# Altium PCB PCB PRP1.PcbDoc
Units mil, origin at the board's own origin, x right, y up, seen from the top; angles counter-clockwise.
Board outline 4830 x 3485 mil, 2 copper layers (Top Layer, Bottom Layer); 14 components, 20 nets, 71 pads, 0 vias.
Unrouted connection lines stored in the file: 1.
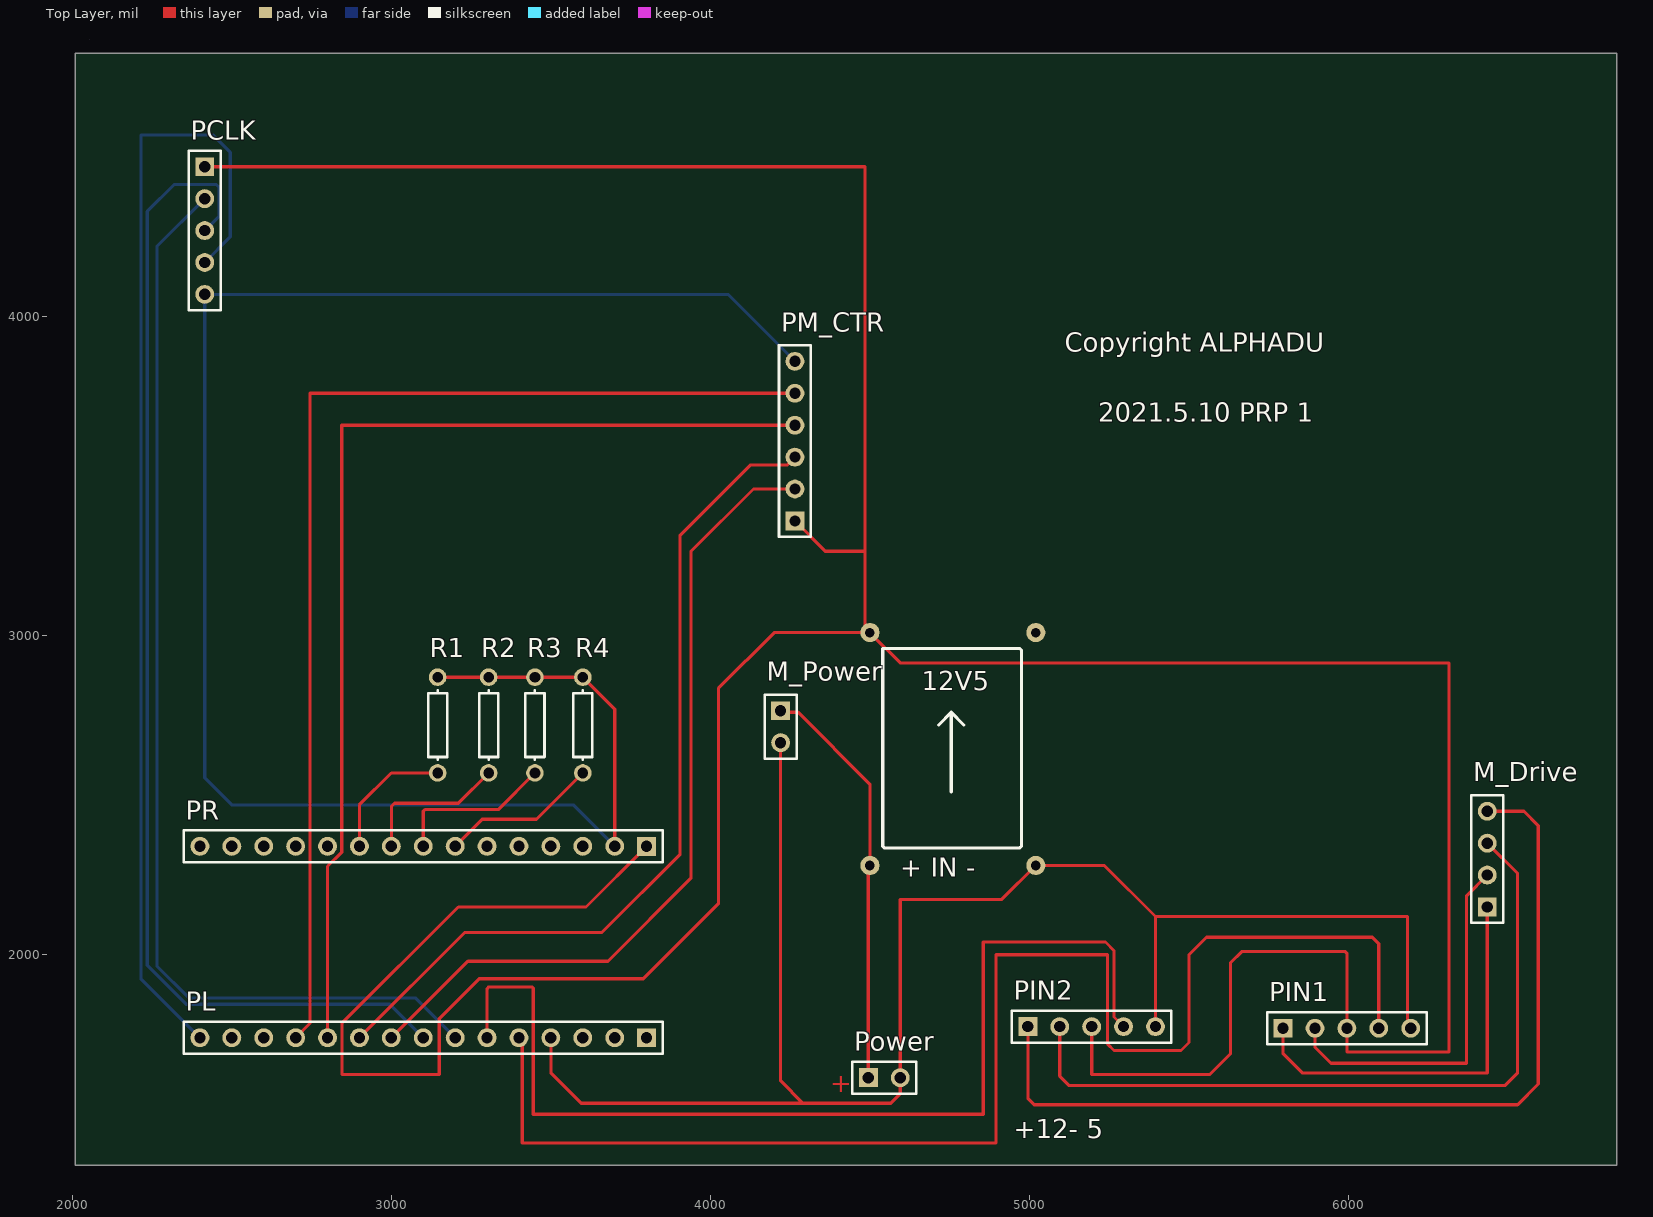
[diagram p0: Top Layer view]
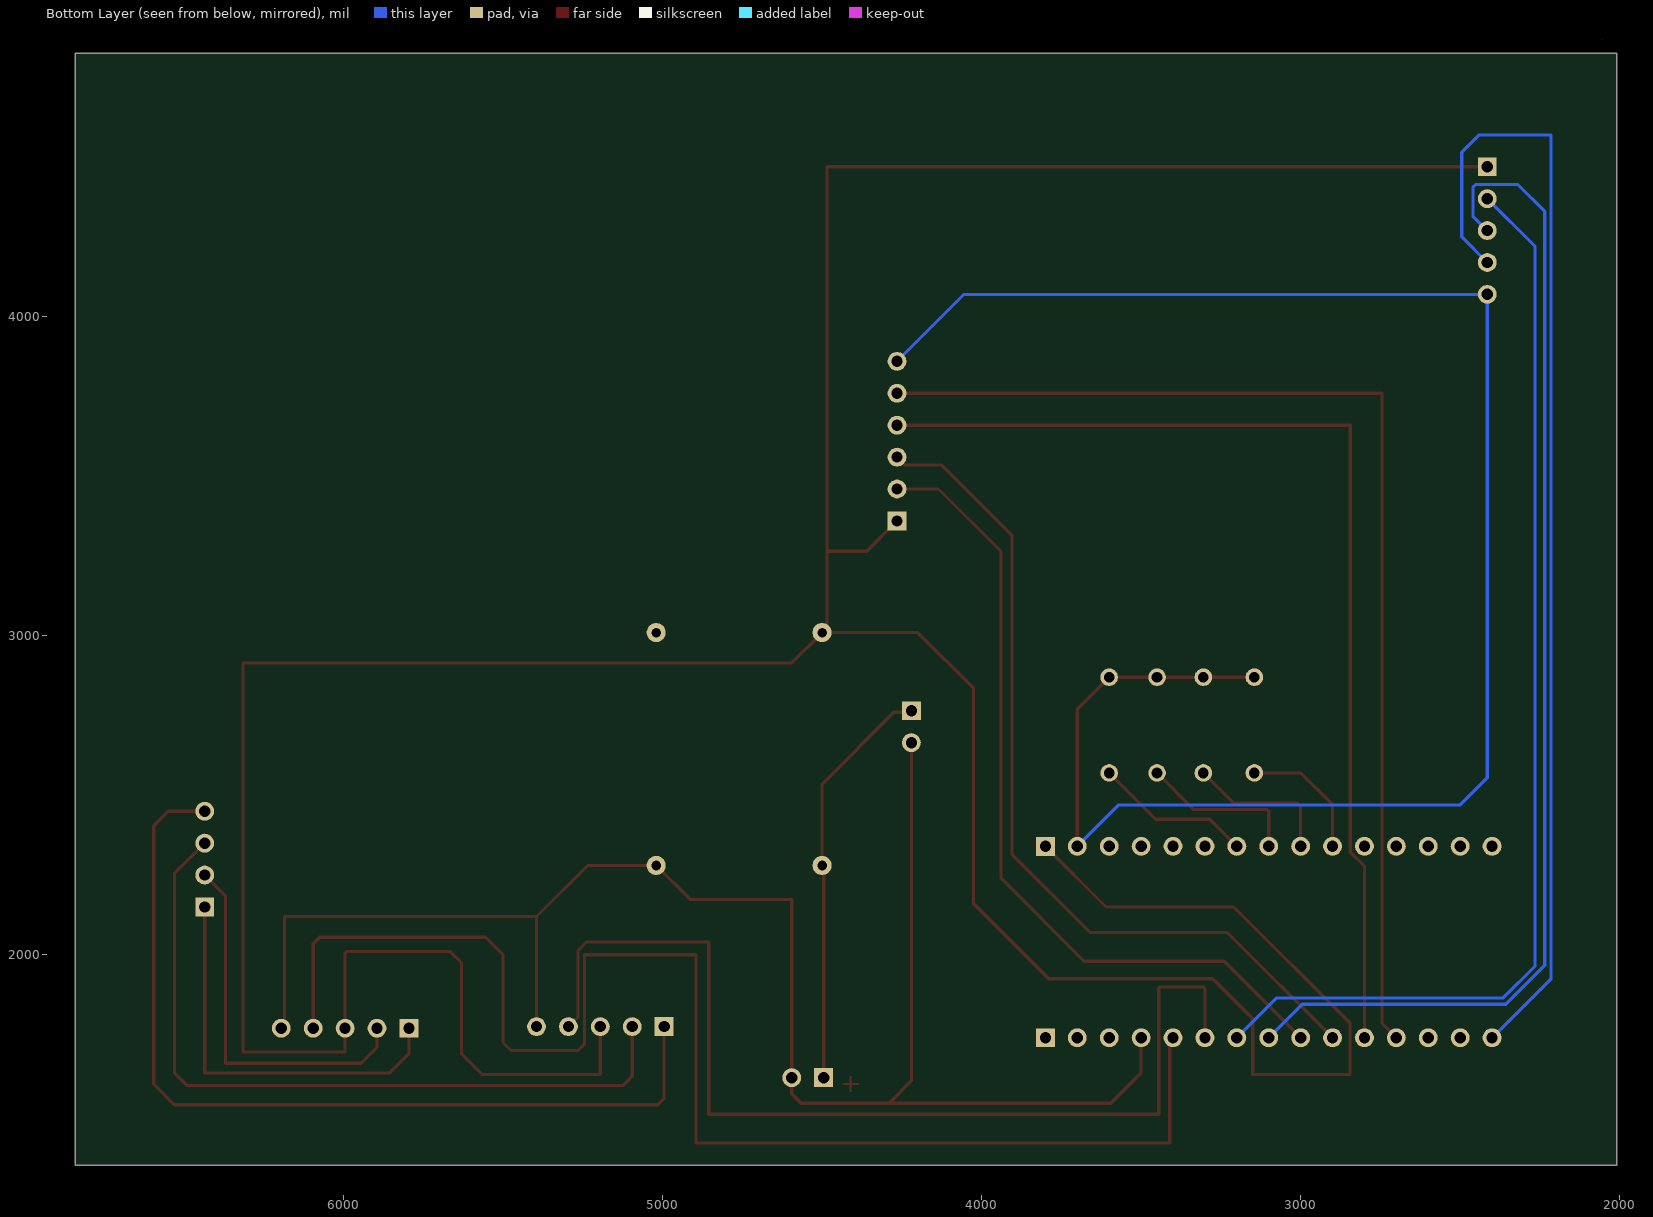
[diagram p1: Bottom Layer view, seen from below]

## Layer stack, top to bottom
Top Solder: solder mask 0.4, Solder Resist, Dk 3.5
Top Layer: signal copper 1.4
Dielectric 1: dielectric 12.6, FR-4, Dk 4.8
Bottom Layer: signal copper 1.4
Bottom Solder: solder mask 0.4, Solder Resist, Dk 3.5

## Board outline
2010,1340 2010,4825 6840,4825 6840,1340
cut-out: 2055,4870

## Design rules (kind name [scope] priority, off if disabled: settings)
Clearance [All] p1: gap=10 ignorepadtopadclearanceinfootprint=FALSE except(0: Arc-Hole Track-Hole SMDPad-Hole THPad-Hole Via-Hole Fill-Hole Poly-Hole Region-Hole Text-Hole)
PolygonConnect [All] p1: connectstyle=Relief reliefconductorwidth=10 reliefentries=4 polygonreliefangle="90 Angle" airgapwidth=10
RoomDefinition Sheet1 [InComponentClass('Sheet1')] p1: confinementstyle=ConfineIn formatcopy=TRUE lockcomponents=FALSE outline 2105,1375 6795,1375 6795,4825 2105,4825
RoutingVias [All] p1: holewidth=28 width=50 viastyle="Through Hole" minholewidth=28 minwidth=50 maxholewidth=28 maxwidth=50
SolderMaskExpansion [All] p1: expansion=4
Width [All] p1: maxlimit=10 minlimit=10 preferedwidth=10
30 further rules are at their usual default settings.

## Components (designator, comment, footprint, x,y, rotation, side; value= is the part's Value field where it differs from the comment)
12V5 "Header 2X2" POWER12V5 4760,2645 r0 top
M_Drive "Header 4" HDR1X4 6435,2150 r90 top
M_Power "Header 2" HDR1X2 4220,2765 r270 top
PCLK "Header 5" HDR1X5 2415,4470 r270 top
PIN1 "Header 5" HDR1X5 5795,1770 r0 top
PIN2 "Header 5" HDR1X5 4995,1775 r0 top
PL "Header 15" HDR1X15 3800,1740 r180 top
PM_CTR "Header 6" HDR1X6 4265,3360 r90 top
Power "Header 2" HDR1X2 4495,1615 r0 top
PR "Header 15" HDR1X15 3800,2340 r180 top
R1 "Res1" AXIAL-0.3 3145,2720 r270 top value=10K
R2 "Res1" AXIAL-0.3 3305,2720 r270 top value=10K
R3 "Res1" AXIAL-0.3 3450,2720 r270 top value=10K
R4 "Res1" AXIAL-0.3 3600,2720 r270 top value=10K

## Footprints (in the part's own frame and the unit in brackets; to place one, negate y for a bottom-side part, rotate by r counter-clockwise, add the part's x,y. Pads: shape width x height; smd on the part's side, far side on the other; paste and mask are expansions set on the pad)
AXIAL-0.3 [mm] "Axial Device, Thru-Hole; 2 Leads; 0.3 in Pin Spacing"
  round 1.4 hole 0.85: 1(-3.81,0) 2(3.81,0)
  silkscreen extent -2.77,-0.76 2.77,0.76
HDR1X2 [mm] "Connector; Header; 2 Position"
  rect 1.5x1.5 hole 0.9: 1(0,0)
  round 1.5 hole 0.9: 2(2.54,0)
  silkscreen extent -1.27,-1.27 3.81,1.27
HDR1X4 [mm] "Connector; Header; 4 Position"
  rect 1.5x1.5 hole 0.9: 1(0,0)
  round 1.5 hole 0.9: 2(2.54,0) 3(5.08,0) 4(7.62,0)
  silkscreen extent -1.27,-1.27 8.89,1.27
HDR1X5 [mm] "Connector; Header; 5 Position"
  rect 1.5x1.5 hole 0.9: 1(0,0)
  round 1.5 hole 0.9: 2(2.54,0) 3(5.08,0) 4(7.62,0) 5(10.16,0)
  silkscreen extent -1.27,-1.27 11.43,1.27
HDR1X6 [mm] "Connector; Header; 6 Position"
  rect 1.5x1.5 hole 0.9: 1(0,0)
  round 1.5 hole 0.9: 2(2.54,0) 3(5.08,0) 4(7.62,0) 5(10.16,0) 6(12.7,0)
  silkscreen extent -1.27,-1.27 13.97,1.27
HDR1X15 [mm] "Connector; Header; 15 Position"
  rect 1.5x1.5 hole 0.9: 1(0,0)
  round 1.5 hole 0.9: 2(2.54,0) 3(5.08,0) 4(7.62,0) 5(10.16,0) 6(12.7,0) 7(15.24,0) 8(17.78,0) 9(20.32,0) 10(22.86,0) 11(25.4,0) 12(27.94,0) 13(30.48,0) 14(33.02,0) 15(35.56,0)
  silkscreen extent -1.27,-1.27 36.83,1.27
POWER12V5 [mil]
  round 60 hole 30: 1(-260,365) 2(260,365) 3(-260,-365) 4(260,-365)
  silkscreen extent -220,-310 215,315

## Part data
12V5: "Header, 2-Pin, Dual row", LatestRevisionDate=17-Jul-2002, LatestRevisionNote="Re-released for DXP Platform.", Publisher="Altium Limited"
M_Drive: "Header, 4-Pin", LatestRevisionDate=17-Jul-2002, LatestRevisionNote="Re-released for DXP Platform.", Publisher="Altium Limited"
M_Power Power: "Header, 2-Pin", LatestRevisionDate=17-Jul-2002, LatestRevisionNote="Re-released for DXP Platform.", Publisher="Altium Limited"
PCLK PIN1 PIN2: "Header, 5-Pin", LatestRevisionDate=17-Jul-2002, LatestRevisionNote="Re-released for DXP Platform.", Publisher="Altium Limited"
PL PR: "Header, 15-Pin", LatestRevisionDate=17-Jul-2002, LatestRevisionNote="Re-released for DXP Platform.", Publisher="Altium Limited"
PM_CTR: "Header, 6-Pin", LatestRevisionDate=17-Jul-2002, LatestRevisionNote="Re-released for DXP Platform.", Publisher="Altium Limited"
R1 R2 R3 R4: "Resistor", LatestRevisionDate=17-Jul-2002, LatestRevisionNote="Re-released for DXP Platform.", PackageDescription="Axial Device, Thru-Hole; 2 Leads; 0.3 in Pin Spacing", PackageReference=AXIAL-0.3, Published=8-Jun-2000, Publisher="Altium Limited"

## Nets (pads, with @x,y where several pads share a name; then routed paths per layer and width w, separated by ;. In a path a pad name is that pad's centre, name@x,y a point inside that pad or via, vN(x,y) a via of type N, cw(c..) or ccw(c..) an arc to the next point about the centre after c; other vN are vias at no path point)
1+: M_Drive.1 PIN1.1 | length 1264.9
  Top Layer w10: PIN1.1 5795,1690 5855,1630 6435,1630 M_Drive.1
1-: M_Drive.2 PIN1.2 | length 1172.6
  Top Layer w10: PIN1.2 5895,1710 5945,1660 6370,1660 6370,2185 M_Drive.2
2+: M_Drive.4 PIN2.1 | length 2848.8
  Top Layer w10: PIN2.1 4995,1550 5015,1530 6530,1530 6595,1595 6595,2405 6550,2450 M_Drive.4
2-: M_Drive.3 PIN2.2 | length 2378.3
  Top Layer w10: PIN2.2 5095,1620 5125,1590 6490,1590 6530,1630 6530,2255 M_Drive.3
+5: 12V5.1 PCLK.1 PIN1.3 PIN2.3 PM_CTR.1 PR.1 | length 12849.9
  Top Layer w10: PCLK.1 4485,4470 4485,3265 ; PR.1 3610,2150 3210,2150 2845,1785 2845,1625 3150,1625 3150,1800 3275,1925 3790,1925 4025,2160 4025,2835 4200,3010 12V5.1 ; PM_CTR.1 4360,3265 4485,3265 ; PIN2.3 5195,1625 5565,1625 5630,1690 5630,1975 5665,2010 5990,2010 5995,2005 PIN1.3 5995,1695 6315,1695 6315,2915 4595,2915 12V5.1 ; 4485,3265 4485,3025 12V5.1
+12: 12V5.3 M_Power.1 Power.1 | length 1297.3
  Top Layer w10: M_Power.1 4225,2760 4275,2760 4500,2535 12V5.3 4495,2275 Power.1
CLK: PCLK.3 PL.8 | length 3740.1
  Bottom Layer w10: PCLK.3 2460,4315 2460,4405.47 2450.94,4414.53 2319.53,4414.53 2235,4330 2235,1966.72 2356.72,1845 2995,1845 PL.8
DAT: PCLK.2 PL.7 | length 3495.3
  Bottom Layer w10: PCLK.2 2265,4220 2265,1965 2365,1865 3075,1865 PL.7
GND: 12V5.4 M_Power.2 PCLK.5 PIN1.5 PIN2.5 PL.4 PM_CTR.6 Power.2 PR.2 R1.1 R2.1 R3.1 R4.1 | length 11290.6
  Top Layer w10: R1.1 R2.1 R3.1 R4.1 3700,2770 PR.2 ; PL.4 3500,1630 3595,1535 4320,1535 4565,1535 4595,1565 Power.2 4595,2173.75 4913.75,2173.75 12V5.4 5235,2280 5395,2120 ; M_Power.2@4225,2660 M_Power.2 4220,1605 4290,1535 ; PM_CTR.6 PM_CTR.6@4270,3865 ; PIN2.5 5395,2120 ; PIN1.5 6185,1780 6185,2120 5395,2120
  Bottom Layer w10: PR.2 3570,2470 2500,2470 2415,2555 PCLK.5 4055,4070 PM_CTR.6
LB: PR.9 R2.2 | length 473.5
  Top Layer w10: PR.9 3000,2465 3010,2475 3210,2475 R2.2
LT: PR.10 R1.2 | length 416.4
  Top Layer w10: PR.10 2900,2470 3000,2570 R1.2
M1+: PL.9 PM_CTR.2 | length 2577.3
  Top Layer w10: PL.9 3240,1980 3679,1980 3939,2240 3939,3264 4135,3460 PM_CTR.2
M1-: PL.10 PM_CTR.3 | length 2704.7
  Top Layer w10: PL.10 3230,2070 3660,2070 3905,2315 3905,3315 4125,3535 4240,3535 PM_CTR.3
M2+: PL.11 PM_CTR.4 | length 3358.9
  Top Layer w10: PL.11 2800,2277.03 2844.53,2321.56 2844.53,3660 PM_CTR.4
M2-: PL.12 PM_CTR.5 | length 3558.6
  Top Layer w10: PL.12 2745,1785 2745,3760 PM_CTR.5
RB: PR.7 R4.2 | length 495.3
  Top Layer w10: PR.7 3285,2425 3455,2425 R4.2
RSTT: PCLK.4 PL.15 | length 3587.5
  Bottom Layer w10: PL.15 2215,1925 2215,4338.28 2215,4570 2440,4570 2495,4515 2495,4250 PCLK.4
RT: PR.8 R3.2 | length 509.7
  Top Layer w10: PR.8 3100,2450 3105,2455 3335,2455 R3.2
WAVE1: PIN1.4 PL.5 | length 4478.8
  Top Layer w10: PL.5 3410,1730 3410,1410 4895,1410 4895,2000 5245,2000 5245,1720 5265,1700 5475,1700 5500,1725 5500,2000 5555,2055 6075,2055 6095,2035 PIN1.4
WAVE2: PIN2.4 PL.6 | length 3320
  Top Layer w10: PL.6 3300,1894.06 3305.47,1899.53 3440,1899.53 3444.53,1895 3444.53,1500 4855,1500 4855,2040 5238.28,2040 5265,2013.28 5265,1805 PIN2.4
pads on no net: 12V5.2 PL.1 PL.2 PL.3 PL.13 PL.14 PR.3 PR.4 PR.5 PR.6 PR.11 PR.12 PR.13 PR.14 PR.15

## Other copper
Top Layer:
  text "+" at 4375,1570 h60

## Silkscreen, mask and mechanical layers (free items; w line width, h text height)
Top Overlay:
  text "Copyright ALPHADU" at 5110,3890 h60
  text "2021.5.10 PRP 1" at 5215,3670 h60
  text "+12- 5" at 4950,1425 h60
Drill Drawing:
  the board outline again, w10

## Text inside footprints (layer, text, board x,y; h text height)
12V5: Top Overlay "+ IN -" at 4595,2245 h60